# Altium PCB B225.PcbDoc
Units mm, origin at the board's own origin, x right, y up, seen from the top; angles counter-clockwise.
Board outline 22 x 40 mm, 4 copper layers (Top, Layer 1, Layer 2, Bottom), stack 1.564 mm thick; 28 components, 32 nets, 109 pads, 142 vias.
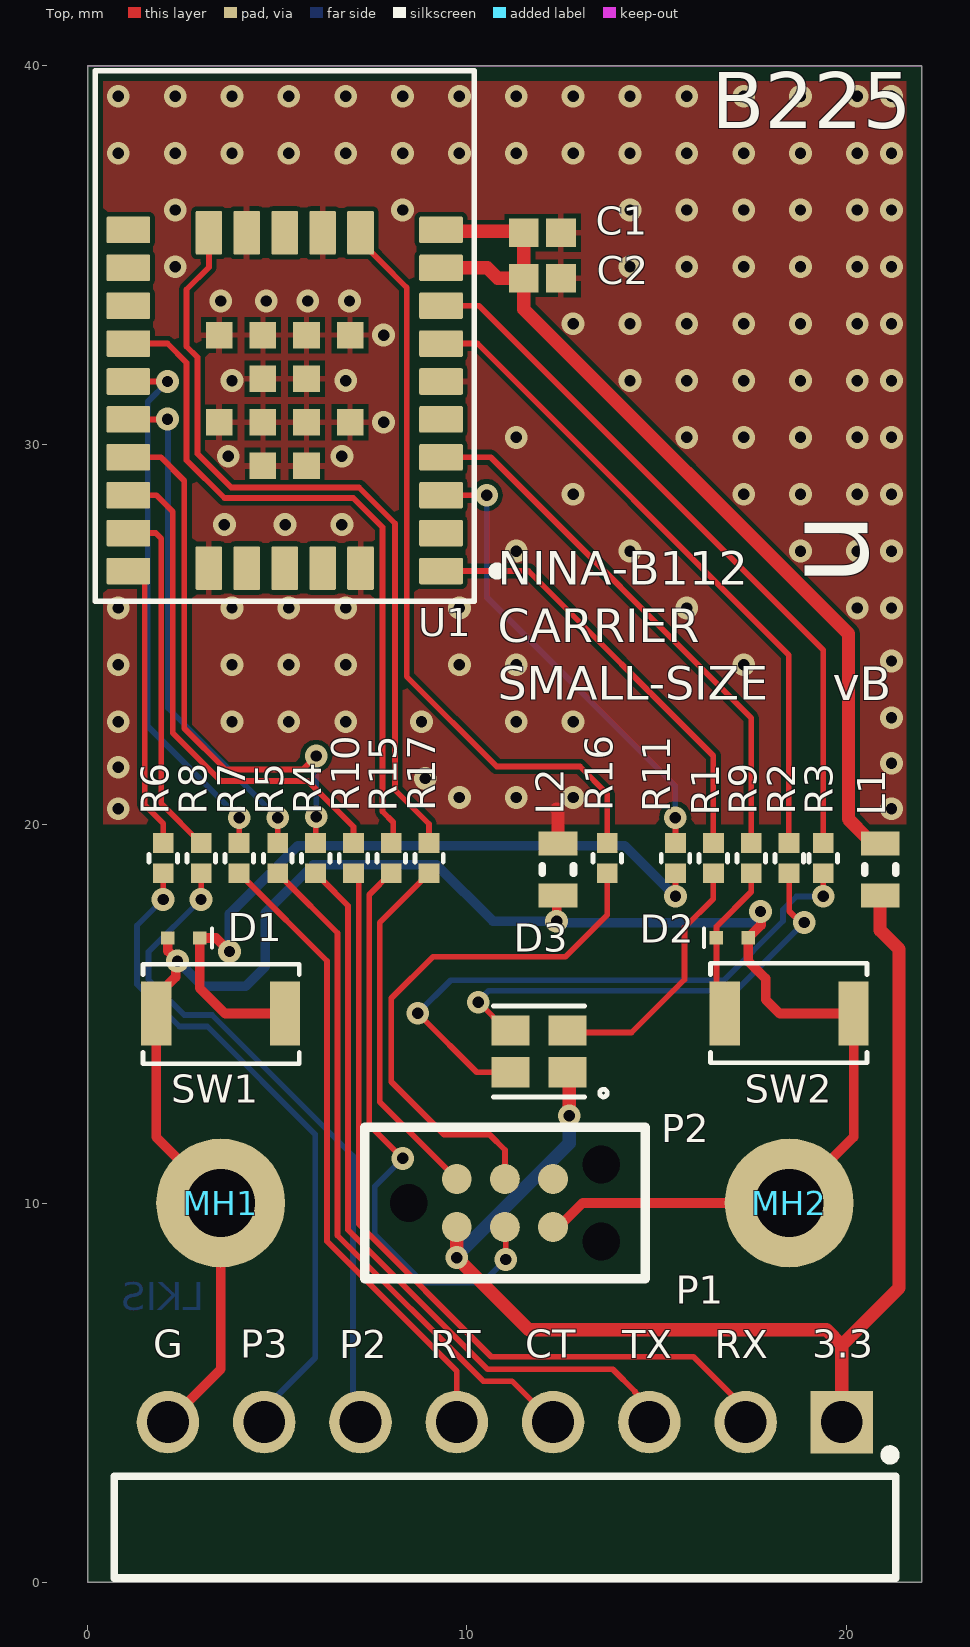
[diagram p0: Top view]
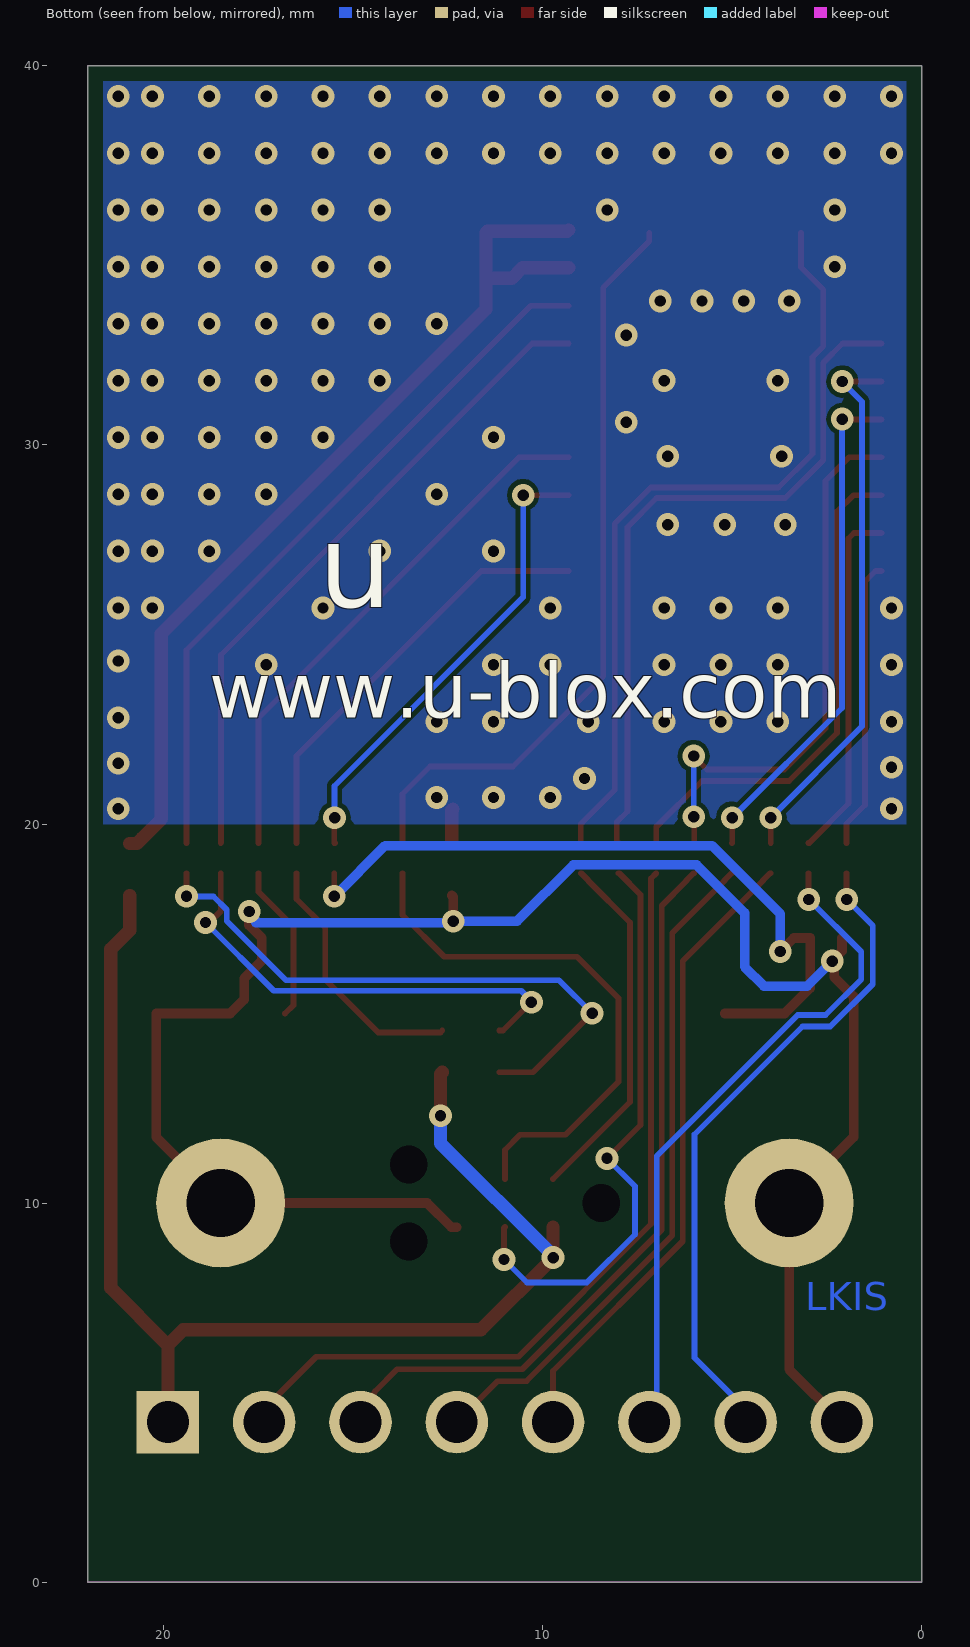
[diagram p1: Bottom view, seen from below]
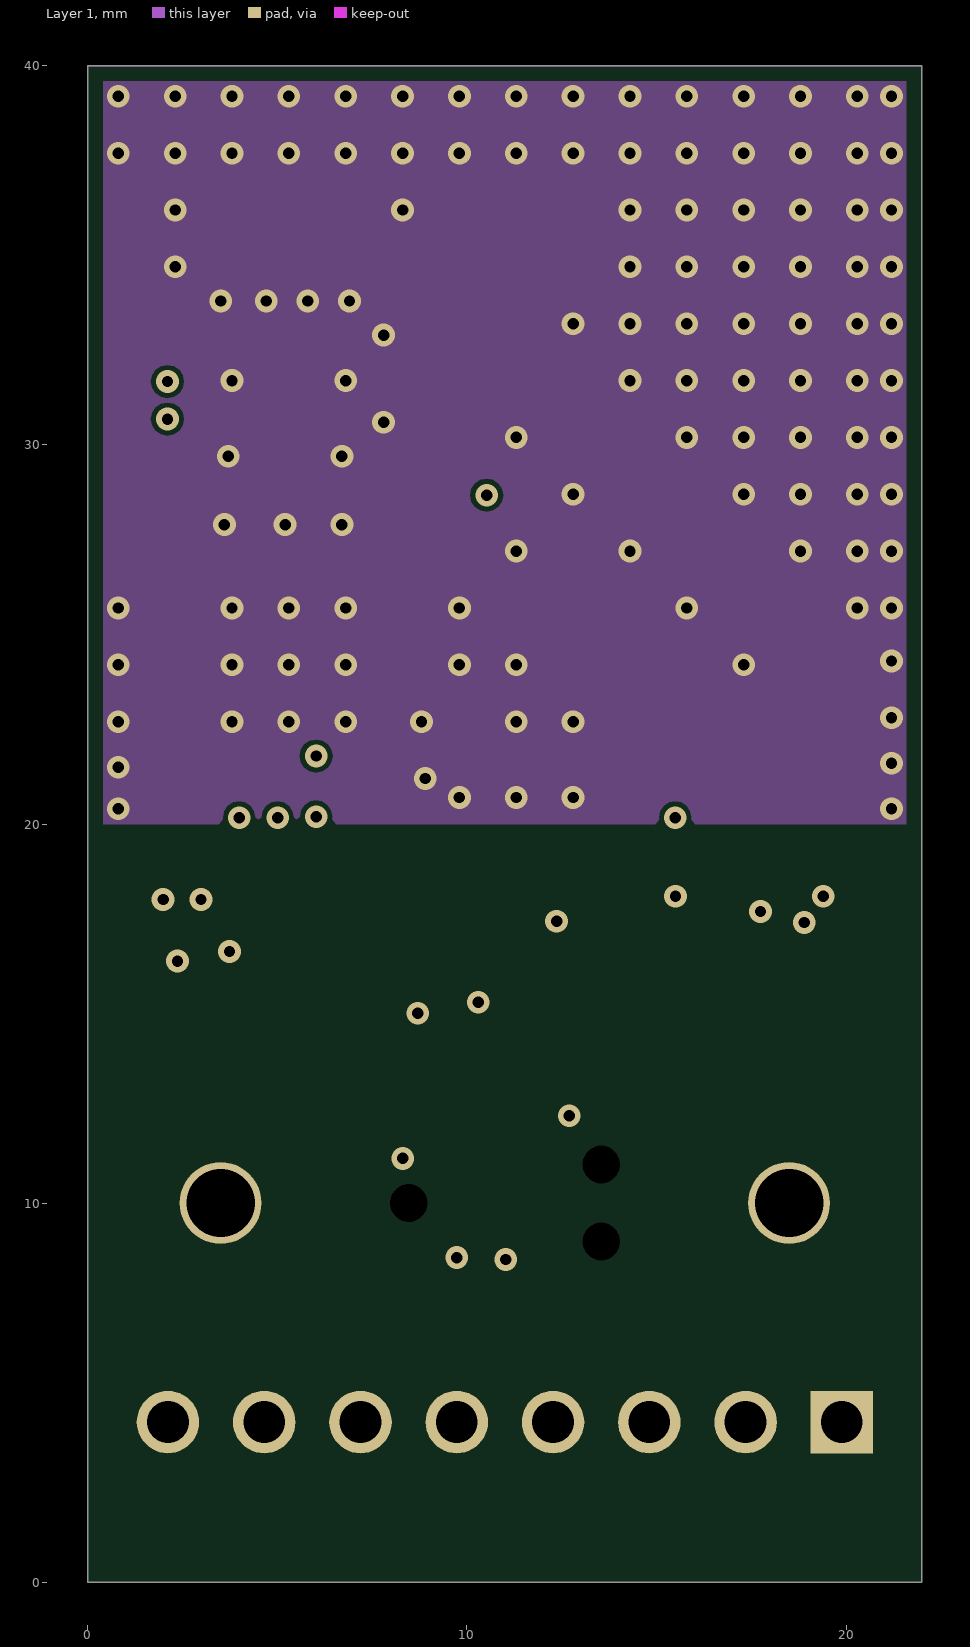
[diagram p2: Layer 1]
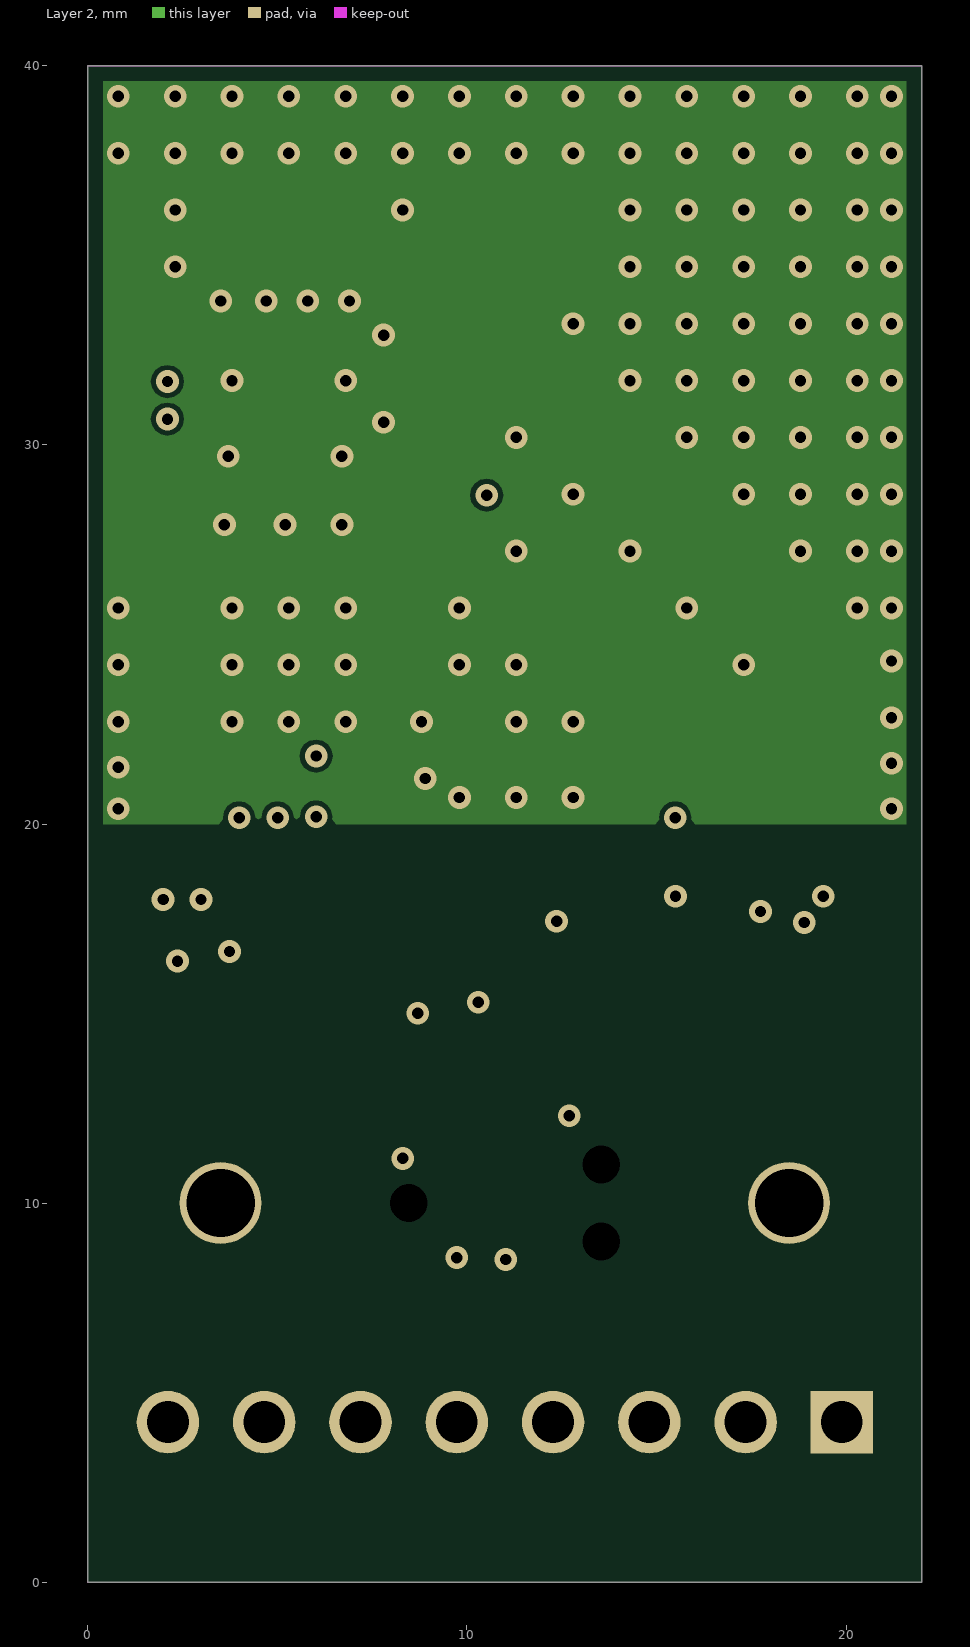
[diagram p3: Layer 2]

## Layer stack, top to bottom
Top Solder: solder mask 0.0203, Solder Resist, Dk 3.5
Top: signal copper 0.0406
Dielectric 1: prepreg 0.0711, PP-006, Dk 4.1
Layer 1: signal copper 0.035
Core: core 1.27, Core-043, Dk 4.3
Layer 2: signal copper 0.035
Dielectric 2: prepreg 0.0711, PP-006, Dk 4.1
Bottom: signal copper 0.0406
Bottom Solder: solder mask 0.0203, Solder Resist, Dk 3.5

## Board outline
0,0 22,0 22,40 0,40

## Design rules (kind name [scope] priority, off if disabled: settings)
BoardOutlineClearance [All] p1: gap=0.4 ignorepadtopadclearanceinfootprint=FALSE
Clearance "Stitching GND" [IsStitchingVia and InNet('GND') vs (IsVia and (Not IsStitchingVia)) Or IsPad] p1: gap=0.127 ignorepadtopadclearanceinfootprint=TRUE
Clearance Clearance_Poly [InPolygon vs OnLayer('Keep-Out Layer') OR (OnLayer('Multi-Layer') AND IsPad  AND Not(PadIsPlated))] p2: gap=0.127 ignorepadtopadclearanceinfootprint=TRUE
Clearance [All] p3: gap=0.127 ignorepadtopadclearanceinfootprint=FALSE except(0: Arc-Text Arc-Hole Track-Text Track-Hole SMDPad-Text SMDPad-Hole THPad-Text THPad-Hole Via-Text Via-Hole Fill-Text Fill-Hole Poly-Text Poly-Hole Region-Text Region-Hole Text-Text Text-Hole)
ComponentClearance [All] p1: gap=0.127 collisioncheckmode=3 verticalgap=0.254 showdistances=FALSE
DiffPairsRouting .14 [All] p1: maxlimit=0.254 minlimit=0.1 mostfreqgap=0.254 toplayer_maxgap=0.1 toplayer_prefgap=0.1 toplayer_minwidth=0.1 toplayer_maxwidth=0.1 toplayer_prefwidth=0.1 midlayer1_mingap=0.254 midlayer1_minwidth=0.381 midlayer1_maxwidth=0.381 midlayer1_prefwidth=0.381 midlayer2_mingap=0.254 midlayer2_minwidth=0.381 midlayer2_maxwidth=0.381 midlayer2_prefwidth=0.381 bottomlayer_maxgap=0.1 bottomlayer_prefgap=0.1 bottomlayer_minwidth=0.1 bottomlayer_maxwidth=0.1 bottomlayer_prefwidth=0.1 maxuncoupledlength=12.7
Height [All] p1: minheight=0 maxheight=25.4 prefheight=2.54
HoleSize [All] p1: absolutevalues=TRUE maxlimit=2540 minlimit=0.127 maxpercent=80.000 minpercent=20.000
HoleToHoleClearance [All] p1: gap=0.152 allowstackedmicrovias=TRUE
MinimumSolderMaskSliver [All] p1: minsoldermaskwidth=0.025
PlaneClearance [InPoly] p1: clearance=0.254
PlaneConnect [All] p1: pad.planeconnectstyle=Relief pad.reliefexpansion=0.508 pad.reliefentries=4 pad.reliefconductorwidth=0.254 pad.reliefairgap=0.254 via.planeconnectstyle=Direct via.reliefexpansion=0.508 via.reliefentries=4 via.reliefconductorwidth=0.254 via.reliefairgap=0.254
PolygonConnect ThermalVias [IsVia] p1: connectstyle=Direct reliefconductorwidth=0.254 reliefentries=4 polygonreliefangle="90 Angle" airgapwidth=0.254
PolygonConnect "PolygonConnect - Power" [InNetClass('')] p2: connectstyle=Relief reliefconductorwidth=0.254 reliefentries=4 polygonreliefangle="90 Angle" airgapwidth=0.127
PolygonConnect PolygonConnect-BGA [InComponentClass('')] p3: connectstyle=Relief reliefconductorwidth=0.152 reliefentries=4 polygonreliefangle="45 Angle" airgapwidth=0.152
PolygonConnect PolygonConnect-General [All] p4: connectstyle=Relief reliefconductorwidth=0.152 reliefentries=4 polygonreliefangle="90 Angle" airgapwidth=0.127
RoutingLayers [All] p1: top layer_v5=TRUE mid layer 1_v5=FALSE mid layer 2_v5=TRUE bottom layer_v5=TRUE
RoutingVias [All] p1: holewidth=0.3 width=0.6 viastyle="Through Hole" minholewidth=0.2 minwidth=0.5 maxholewidth=7 maxwidth=1
SMDEntry [All] p1 off: side=TRUE corner=TRUE anyangle=TRUE
SilkToBoardRegionClearance [All] p1 off:
SilkToSilkClearance [All] p1 off: silktosilkclearance=0.025
SilkToSolderMaskClearance [IsPad] p1 off: minsilkscreentomaskgap=0 clearancetoexposedcopper=TRUE
SolderMaskExpansion SolderMaskExpansion_via [IsVia] p1: expansion=-0.254 istentingtop=TRUE
SolderMaskExpansion [All] p2: expansion=0.05 istentingtop=FALSE
UnRoutedNet [All] p1: checkbadconnections=TRUE
ViasUnderSMD [All] p1: allowed=FALSE
Width [All] p1: maxlimit=2.54 minlimit=0.127 preferedwidth=0.152 toplayer_maxwidth=1 toplayer_prefwidth=0.152 bottomlayer_maxwidth=1 bottomlayer_prefwidth=0.152 minimp=50.000000 maximp=50.000000 favimp=50.000000
Width Width_1 [All] p2: maxlimit=0.254 minlimit=0.254 preferedwidth=0.254
17 further rules are at their usual default settings.

## Components (designator, comment, footprint, x,y, rotation, side; value= is the part's Value field where it differs from the comment)
C1 "Capacitor 0.1 uF +/- 5% 16 V 0402" CAPC1005X56X25ML10T15 11.99,35.6 r180 top value=100nF
C2 "Capacitor 0.1 uF +/- 5% 16 V 0402" CAPC1005X56X25ML10T15 11.99,34.4 r0 top value=100nF
D1 "110-00019" SOD-923 2.526,16.993 r180 top
D2 "110-00019" SOD-923 17,17 r0 top
D3 "115-00011" 4-PLCC 11.9,14 r0 top
L1 "LQW18AN56NJ00D" INDC1608X100X30LL20T10 20.9,18.8 r270 top
L2 "LQW18AN56NJ00D" INDC1608X100X30LL20T10 12.4,18.8 r90 top
MH1 "MH_M1.5DNP" MH_M1.5 3.5,10 r0 top
MH2 "MH_M1.5DNP" MH_M1.5 18.5,10 r0 top
P1 "61300811021" 61300811021 11,1.45 r0 top
P2 "TC2030-IDC-NLDNP" TC2030-IDC-NL 8.46,10 r0 top
R1 "180-00031499R" "RES 0402 HD" 16.5,19.1 r270 top value=499R
R2 "180-00098220R" "RES 0402 HD" 18.5,19.1 r270 top value=220R
R3 "180-00098220R" "RES 0402 HD" 19.4,19.1 r270 top value=220R
R4 "180-00098220R" "RES 0402 HD" 6.007,19.1 r270 top value=220R
R5 "180-00098220R" "RES 0402 HD" 5.007,19.1 r270 top value=220R
R6 "180-00098220R" "RES 0402 HD" 1.987,19.1 r270 top value=220R
R7 "180-00098220R" "RES 0402 HD" 3.988,19.101 r270 top value=220R
R8 "180-00098220R" "RES 0402 HD" 2.987,19.1 r270 top value=220R
R9 "180-00098220R" "RES 0402 HD" 17.5,19.1 r270 top value=220R
R10 "180-00098220R" "RES 0402 HD" 7.007,19.1 r270 top value=220R
R11 "180-00098220R" "RES 0402 HD" 15.5,19.1 r270 top value=220R
R15 "180-00098220R" "RES 0402 HD" 8,19.1 r90 top value=220R
R16 "180-00098220R" "RES 0402 HD" 13.7,19.1 r90 top value=220R
R17 "180-00098220R" "RES 0402 HD" 9,19.1 r90 top value=220R
SW1 "135-00007" B3U-1000P 3.5,15 r180 top
SW2 "135-00007" B3U-1000P 18.5,15 r0 top
U1 "NINA-B112-OPENCPU" NINA_LGA42R_1400X1000X380_PIFA 5.19,32.875 r90 top

## Footprints (in the part's own frame and the unit in brackets; to place one, negate y for a bottom-side part, rotate by r counter-clockwise, add the part's x,y. Pads: shape width x height; smd on the part's side, far side on the other; paste and mask are expansions set on the pad)
4-PLCC [mm] "4 Pin Plastic Leaded Chip Carrier, 2mm x 2mm"
  rect 1x0.8 smd: 1(0.75,-0.55) 2(-0.75,-0.55) 3(-0.75,0.55) 4(0.75,0.55)
  silkscreen extent -1.2,-1.2 1.8,1.2, body extent -1.05,-1.05 1.05,1.05, height 1.01
61300811021 [mm]
  rect 1.65x1.65 hole 1.1: 1(8.89,2.77)
  round 1.65 hole 1.1: 2(6.35,2.77) 3(3.81,2.77) 4(1.27,2.77) 5(-1.27,2.77) 6(-3.81,2.77) 7(-6.35,2.77) 8(-8.89,2.77)
  silkscreen extent -10.31,-1.35 10.31,2.03, body extent -10.16,-7.27 10.16,3.09, height 2.58
B3U-1000P [mm] "Button Tactile, SMT 4mm x 2.5mm, height 1.2mm"
  rect 0.8x1.7 smd: 1(-1.7,0) 2(1.7,0)
  silkscreen extent -2.07,-1.3 2.05,1.33, body extent -2,-1.25 2,1.25, height 1.6
CAPC1005X56X25ML10T15 [mm] "Chip Capacitor, 2-Leads, Body 1.10x0.60mm, IPC Low Density"
  rect 0.78x0.74 smd: 1(-0.49,0) 2(0.49,0)
  body extent -0.55,-0.3 0.55,0.3, height 0.56
INDC1608X100X30LL20T10 [mm] "Chip Inductor, 2-Leads, Body 1.8x1.1mm, IPC High Density"
  rect 0.64x1.02 smd: 1(-0.685,0) 2(0.685,0)
  silkscreen extent -0.1,-0.41 0.1,0.41, body extent -0.9,-0.55 0.9,0.55, height 1
MH_M1.5 [mm] "Mounting Hole M1.5 Metric, 3.4mm diameter pad"
  round 3.4 / inner round 2.159 / far side round 3.4 hole 1.8: 1(0,0)
NINA_LGA42R_1400X1000X380_PIFA [mm] "Stand-alone Bluetooth low energy module"
  rrect10% 0.7x1.15 smd paste+0 mask+0.05: 1(-6.2,-4.125) 2(-5.2,-4.125) 3(-4.2,-4.125) 4(-3.2,-4.125) 5(-2.2,-4.125) 6(-1.2,-4.125) 7(-0.2,-4.125) 8(0.8,-4.125) 9(1.8,-4.125) 10(2.8,-4.125) 16(2.8,4.125) 17(1.8,4.125) 18(0.8,4.125) 19(-0.2,4.125) 20(-1.2,4.125) 21(-2.2,4.125) 22(-3.2,4.125) 23(-4.2,4.125) 24(-5.2,4.125) 25(-6.2,4.125)
  rrect10% 1.15x0.7 smd paste+0 mask+0.05: 11(2.725,-2) 12(2.725,-1) 13(2.725,0) 14(2.725,1) 15(2.725,2) 26(-6.125,2) 27(-6.125,1) 28(-6.125,0) 29(-6.125,-1) 30(-6.125,-2)
  rect 0.7x0.7 smd paste+0 mask+0.05: 31(-3.425,-0.575) 32(-3.425,0.575) 33(-2.275,-1.725) 34(-2.275,-0.575) 35(-2.275,0.575) 36(-2.275,1.725) 37(-1.125,-0.575) 38(-1.125,0.575) 39(0.025,-1.725) 40(0.025,-0.575) 41(0.025,0.575) 42(0.025,1.725)
  silkscreen extent -7,-5.7 7,5, body extent -7,-5 7,5, height 3.81
"RES 0402 HD" [mm] "Chip Resistor, 2-Leads, Body 1.05x0.54mm, IPC High Density"
  rect 0.52x0.55 smd: 1(-0.4,0) 2(0.4,0)
  silkscreen extent -0.1,-0.38 0.1,0.38, body extent -0.55,-0.3 0.55,0.3, height 0.4
SOD-923 [mm] "SOD-923, 2-Leads, Body 1.25x2.50mm, IPC High Density,"
  rect 0.36x0.35 smd mask+0.05: 1(-0.42,0) 2(0.42,0)
  silkscreen extent -0.75,-0.25 -0.75,0.25, body extent -0.4,-0.3 0.4,0.3, height 0.4
TC2030-IDC-NL [mm] "Tag-Connect 6-Pin No Legs"
  round 0.9 hole 0.995 unplated: 0(0,0) 0(5.08,-1.016) 0(5.08,1.016)
  round 0.79 smd paste-0.39: 1(1.27,-0.635) 2(1.27,0.635) 3(2.54,-0.635) 4(2.54,0.635) 5(3.81,-0.635) 6(3.81,0.635)
  silkscreen extent -1.16,-2 6.24,2

## Part data
C1 C2: library part CMP-001-00001-4, "Chip Capacitor, 0.1 uF, +/- 5%, 16 V, 0402 (1005 Metric)", Capacitor Type=Ceramic, Case/Package=0402, Max Operating Temperature=125°C, Min Operating Temperature=-55°C, Tolerance=5%, Voltage Rating=16V, Mounting Technology=SM, Pins=2, RoHS Compliant=True
D1 D2: "Diode, ESD9B, 3.3V, ST5G, SOD-923", Manufacturer="ON Semiconductor", Manufacturer P/N=ESD9B3.3ST5G, MFG Package=SOD-923, Package Type=SOD, Part Name="Diode TVS 3.3V SOD-923", Voltage=3.3V, Arena Link=https://app.bom.com/a/4M5DJQ9Q9SR7DV4H?v=spec.summary, Body Size="0.8mm x 0.6mm", Component Mounting Type=SMT, Diode Type=TVS, Height=0.4mm, Item_Phase=Production, Part Number=110-00019, Part_Type=Diode, Pins=2, Revision=0A, Supplier 1=Arrow, Supplier Part Number 1=ESD9B3.3ST5G, Use in new designs=Yes
D3: "LED, RGB Diffused SMT, PLCC4 4 Pin", Color=RGB, Current="20mA Red, 10mA Green, 10mA, Blue", Manufacturer="Cree, Inc.", Manufacturer P/N=CLMVB-FKA-CFHEHLCBB7a363, MFG Package=PLCC4, Package Type=Custom, Part Name="LED RGB SMT 2mm x 2mm", Supplier Part Number 1=941-CLMVBFKACFHEHLCB, Voltage=5V, Arena Link=https://app.bom.com/a/UCV39GZGZIHY581D?v=spec.summary, Body Size="2.0mm x 2.0mm", Component Mounting Type=SMT, Height=1mm, Item_Phase=Production, Mounting Type=Vertical, Number of Circuits=3, Part Number=115-00011, Part_Type=LED, Pins=4, Revision=0A, Supplier 1=Mouser, Use in new designs=Yes, Vf="2V Red, 3V Green, 3V Blue"
L1 L2: library part CMP-2000-06600-1, "Chip Inductor, 56 nH, +/-5%, 390 mA, -55 to 125 degC, 0603 (1608 Metric), RoHS, Tape and Reel", Current Rating=360mA, DC Resistance (DCR)=290mOhmMax, Frequency - Self Resonant=2.4GHz, Frequency - Test=100MHz, Inductance=56nH, Manufacturer=Murata, Operating Temperature=-55°C~125°C, Package / Case=0603(1608Metric), Package Description="2-Pin Surface Mount Device, Body 1.6 x 0.8 mm", Package Reference=0603, Q @ Freq=38@200MHz, Standard Package=1, Tolerance=±5%, Category=Inductors,Coils,Chokes, Datasheet URL=http://search.murata.co.jp/Ceramy/image/img/PDF/ENG/L0075S0080LQW18A_10.pdf, Datasheet Version=1/2019, Family=FixedInductors, Height - Seated (Max)="0.039\"(1.00mm)", Manufacturer URL=http://www.murata.com/, Material - Core=Non-Magnetic, Mounting Technology=SurfaceMount, Mounting Type=SurfaceMount, Online Catalog=LQWSeries, Other Names=490-6876-1, Packaging=CutTape(CT), Product Training Modules=InductorProductsChipRFInductors, Series=LQW18A_00, Shielding=Unshielded, Size / Dimension="0.063\"Lx0.031\"W(1.60mmx0.80mm)", Type=Wirewound
MH1 MH2: library part MH_M1.5, "1.5M screw mounting hole, plated", Added By="Jeremy D", Added Date=2015-07-09, DNP=DNP, Height=0mm, Part Number=MH_M1.5, Size="3.4mm x 3.4mm", Type="Mounting Hole"
P1: library part CMP-1502-01075-1, "THT Angled Pin Header WR-PHD, Pitch 2.54 mm, Single Row, 8 pins", Contact Resistance=20mOhm, Manufacturer="Wurth Elektronik", Operating Temperature=-40to105degC, Rated Current=3A, Withstanding Voltage=500VAC, Working Voltage=250VAC, Datasheet URL=https://katalog.we-online.de/em/datasheet/6130xx11021.pdf, Gender=Male, Manufacturer Part Number=61300811021, Manufacturer URL=http://www.we-online.de, Mounting Technology=THT, Orientation=Angled, Package Reference=61300811021, Packaging=Bag, Part Number=61300811021, Pin Number=8, Pitch=2.54mm, Publisher=WurthElektronik, Row Number=Single
P2: library part TC2030-IDC-NL, "CON PADS FOR CBL PLUG-OF-NAILS 6-PIN NO LEGS", Manufacturer="TAG Connect", Added By="Paul B", Added Date=2015-04-22, DNP=DNP, Height=0, Manufacturer P/N=TC2030-IDC-NL, Part Number=TC2030-IDC-NL, Size="6.731mm x 12.446mm"
R1: library part 180-00031, "Resistor, 499ohm, 1%, 1/16W, 0402", Manufacturer="Rohm Semiconductor", Manufacturer 2="Samsung Electro-Mechanics America, Inc", Manufacturer P/N=MCR01MRTF4990, Manufacturer P/N 2=RC1005F4990CS, Part Name="RES SMD 499 OHM 1% 1/16W 0402", Power=1/16W, Supplier Part Number 1=RHM499CDCT-ND, Tolerance="+/- 1%", Alternate Footprint Ref="RES 0402", Arena Link=https://app.bom.com/a/Q8RZ5CVCVEDU1SS5?v=spec.summary, Component Mounting Type=SMT, Height=0.4mm, Item_Phase=Production, Part Number=180-00031, Part_Type=Resistor, Pins=2, Revision=0D, Size=0402, Supplier 1=Digi-Key, Supplier 2=Digi-Key, Supplier Part Number 2=1276-3992-1-ND, Use in new designs=Yes
R2 R3: library part 180-00098, "Resistor, 220ohm, 5%, 1/16W, 0402.", Manufacturer="Panasonic Electronic Components", Manufacturer 2="Samsung Electro-Mechanics America, Inc", Manufacturer P/N=ERJ-2GEJ221X, Manufacturer P/N 2=RC1005J221CS, Part Name="RES SMD 220 OHM 5% 1/16W 0402", Power=1/16W, Supplier Part Number 1=P220JCT-ND, Tolerance="+/- 5%", Alternate Footprint Ref="RES 0402", Arena Link=https://app.bom.com/a/8Q9HNUDUDWVBJC30?v=spec.summary, Component Mounting Type=SMT, Height=0.4mm, Item_Phase=Production, Part Number=180-00098, Part_Type=Resistor, Pins=2, Revision=0C, Size=0402, Supplier 1=Digi-Key, Supplier 2=Digi-Key, Supplier Part Number 2=1276-4360-1-ND, Use in new designs=Yes
R4 R5 R6 R7 R8 R9 R10 R11 R15 R16 R17: library part 180-00098, "Resistor, 220ohm, 5%, 1/16W, 0402.", Manufacturer 1="Samsung Electro-Mechanics America, Inc", Manufacturer 2="Panasonic Electronic Components", Manufacturer Part Number 1=RC1005J221CS, Manufacturer Part Number 2=ERJ-2GEJ221X, Max Operating Temp=155, Min Operating Temp=-55, Part Name="RES SMD 220 OHM 5% 1/16W 0402", Power=1/16W, Supplier Part Number 1=1276-4360-1-ND, Tolerance="+/- 5%", Voltage=None, Height=0.4mm, Item Phase="In Production", Part Number=180-00098, Pins=2, Revision=0C, Size=0402, Supplier 1=Digi-Key, Supplier 2=Digi-Key, Supplier Part Number 2=P220JCT-ND, UBX Code=None, Use in new designs=Yes
SW1 SW2: "Button, Momentary SPST-NO, 0.05A, 12V, 3mm x 2.5mm", Current=50mA, Manufacturer="Omron Electronics Inc-EMC Div", Manufacturer P/N=B3U-1000P, Part Name="SWITCH TACTILE SPST-NO 0.05A 12V", Supplier Part Number 1=SW1020CT-ND, Voltage=12VDC, Arena Link=https://app.bom.com/a/TBU28FYFYHGV5FQ0?v=spec.summary, Body Size="3mm x 2.5mm", Component Mounting Type=SMT, Height=1.2mm, Item_Phase=Production, Part Number=135-00007, Part_Type=Button, Pins=2, Revision=0A, Supplier 1=Digi-Key, Switch/Button Circuit=SPST, Switch/Button Function=Off-Mom, Use in new designs=Yes
U1: "u-blox NINA-B112 Bluetooth 5 LE module", Manufacturer=u-blox, Part Description="Stand-alone Bluetooth low energy module"

## Via types
v1: diameter 0.6, hole 0.3, Top to Bottom, tented both sides, 142 vias

## Nets (pads, with @x,y where several pads share a name; then routed paths per layer and width w, separated by ;. In a path a pad name is that pad's centre, name@x,y a point inside that pad or via, vN(x,y) a via of type N, cw(c..) or ccw(c..) an arc to the next point about the centre after c; other vN are vias at no path point)
3V3: D3.1 L1.2 P1.1 P2.1 | length 32.8
  Top w0.35: P2.1 9.73,8.558 11.633,6.655 19.485,6.655 19.89,6.25 ; D3.1 12.7,13.4 v1(12.7,12.3) ; P1.1 19.89,6.25 ; L1.2 20.9,17.2 21.4,16.7 21.4,7.76 19.89,6.25
  Bottom w0.35: v1(9.728,8.56) 9.728,8.603 12.7,11.574 v1(12.7,12.3)
3V3_M: C1.2 C2.1 L1.1 U1.9 U1.10 | length 24.6
  Top w0.35: U1.9 10.537,34.675 10.812,34.4 C2.1 ; U1.10 9.352,35.637 11.463,35.637 C1.2 C2.1 ; L1.1 20.71,19.485 20.565,19.63 20.066,20.129 20.066,25.019 11.5,33.585 C2.1
B_M: R3.1 U1.8 | length 18.9
  Top w0.152: U1.8 10.318,33.675 19.4,24.593 R3.1
BLUE: D3.2 R3.2 | length 15.7
  Top w0.152: v1@8.8,14.91 10.26,13.45 D3.2 ; v1(19.4,18.09) R3.2
  Bottom w0.152: v1(8.7,15.01) 9.569,15.879 16.779,15.879 18.339,17.439 18.339,17.739 18.69,18.09 v1(19.4,18.09)
BT1_M: R11.1 U1.3 | length 12.5
  Top w0.152: U1.3 v1(10.519,28.675) v1@10.521,28.677 ; R11.1@15.485,19.5 R11.1 15.5,20.162 v1(15.494,20.168)
  Bottom w0.152: v1(10.519,28.675) 10.519,25.981 15.494,21.006 v1(15.494,20.168)
BT2_M: R9.1 U1.4 | length 14.3
  Top w0.152: U1.4 10.625,29.675 17.5,22.8 R9.1
BUTTON1: D1.1 R11.2 SW1.1 | length 19.5
  Top w0.152: v1(15.5,18.09) R11.2
  Top w0.254: v1(3.734,16.637) 3.378,16.993 D1.1 2.946,15.672 3.618,15 SW1.1
  Bottom w0.254: v1(3.734,16.637) 3.734,17.628 5.537,19.431 14.159,19.431 v1(15.5,18.09)
BUTTON2: D2.1 R9.2 SW2.1 | length 4.2
  Top w0.152: SW2.1 16.58,15.22 D2.1 16.58,17.291 17.5,18.211 R9.2
CLK_M: R16.2 U1.11 | length 20.1
  Top w0.152: U1.11 7.19,35.375 7.716,34.849 8.407,34.158 8.407,23.893 10.786,21.514 12.979,21.514 13.7,20.793 R16.2
CTS: P1.4 R5.2 | length 17.9
  Top w0.152: R5.2 5.022,18.7 5.206,18.516 5.206,18.501 6.584,17.123 6.584,9.142 10.426,5.3 11.19,5.3 P1.4
CTS_M: R5.1 U1.21 | length 13.4
  Top w0.152: U1.21 2.089,30.675 v1(2.097,30.683) ; v1(5.004,20.168) 5.004,19.503 R5.1
  Bottom w0.152: v1(2.097,30.683) 2.108,30.672 2.108,23.063 v1(5.004,20.168)
G_M: R2.1 U1.7 | length 17.5
  Top w0.152: U1.7 10.276,32.675 18.491,24.46 18.491,19.509 R2.1
GND: D1.2 D2.2 L2.1 MH1.1 MH2.1 P1.8 P2.5 SW1.2 SW2.2 | length 51.1
  Top w0.254: D1.2 2.106,16.649 2.362,16.393 v1(2.362,16.383) 2.314,16.334 2.314,15.964 1.8,15.45 SW1.2 1.8,11.736 3.5,10.036 MH1.1 3.5,5.61 P1.8 ; P2.5 12.415,9.365 13.05,10 MH2.1 18.5,10.036 20.2,11.736 SW2.2 18.249,15 17.882,15.367 17.882,15.929 17.42,16.39 D2.2 17.425,17 17.757,17.332 17.757,17.676 v1(17.743,17.69) ; v1(12.363,17.436) 12.363,18.078 L2.1
  Bottom w0.254: v1(2.362,16.383) 3.023,15.723 4.166,15.723 4.674,16.231 4.674,17.653 5.944,18.923 9.195,18.923 10.682,17.436 v1(12.363,17.436) 12.4,17.399 17.577,17.399 17.577,17.454 17.743,17.621 v1(17.743,17.69)
GND_M: C1.1 C2.2 L2.2 U1.6 U1.12 U1.14 U1.26 U1.30 U1.31 U1.32 U1.33 U1.34 U1.35 U1.36 U1.37 U1.38 U1.39 U1.40 U1.41 U1.42 | length 0.9
  Top w0.35: 12.37,20.396 12.4,20.366 L2.2
  other v1: 0.8,20.4 21.2,20.4 9.8,20.7 11.3,20.7 12.8,20.7 8.9,21.2 0.8,21.5 21.2,21.6 0.8,22.7 3.8,22.7 5.3,22.7 6.8,22.7 8.8,22.7 11.3,22.7 12.8,22.7 21.2,22.8 0.8,24.2 3.8,24.2 5.3,24.2 6.8,24.2 9.8,24.2 11.3,24.2 17.3,24.2 21.2,24.3 0.8,25.7 3.8,25.7 5.3,25.7 6.8,25.7 9.8,25.7 15.8,25.7 20.3,25.7 21.2,25.7 11.3,27.2 14.3,27.2 18.8,27.2 20.3,27.2 21.2,27.2 3.6,27.9 5.2,27.9 6.7,27.9 12.8,28.7 17.3,28.7 18.8,28.7 20.3,28.7 21.2,28.7 3.7,29.7 6.7,29.7 11.3,30.2 15.8,30.2 17.3,30.2 18.8,30.2 20.3,30.2 21.2,30.2 7.8,30.6 3.8,31.7 6.8,31.7 14.3,31.7 15.8,31.7 17.3,31.7 18.8,31.7 20.3,31.7 21.2,31.7 7.8,32.9 12.8,33.2 14.3,33.2 15.8,33.2 17.3,33.2 18.8,33.2 20.3,33.2 21.2,33.2 3.5,33.8 4.7,33.8 5.8,33.8 6.9,33.8 2.3,34.7 14.3,34.7 15.8,34.7 17.3,34.7 18.8,34.7 20.3,34.7 21.2,34.7 2.3,36.2 8.3,36.2 14.3,36.2 15.8,36.2 17.3,36.2 18.8,36.2 20.3,36.2 21.2,36.2 0.8,37.7 2.3,37.7 3.8,37.7 5.3,37.7 6.8,37.7 8.3,37.7 9.8,37.7 11.3,37.7 12.8,37.7 14.3,37.7 15.8,37.7 17.3,37.7 18.8,37.7 20.3,37.7 21.2,37.7 0.8,39.2 2.3,39.2 3.8,39.2 5.3,39.2 6.8,39.2 8.3,39.2 9.8,39.2 11.3,39.2 12.8,39.2 14.3,39.2 15.8,39.2 17.3,39.2 18.8,39.2 20.3,39.2 21.2,39.2
GREEN: D3.3 R2.2 | length 12.3
  Top w0.152: v1@10.214,15.29 10.3,15.376 v1(10.3,15.3) 11.05,14.55 D3.3 ; R2.2 18.5,17.7 18.8,17.4 v1(18.9,17.4)
  Bottom w0.152: v1@10.3,15.376 10.324,15.4 10.367,15.4 10.567,15.6 17.1,15.6 v1(18.9,17.4)
IO_M: R17.2 U1.15 | length 21
  Top w0.152: U1.15 3.19,34.69 2.6,34.1 2.6,32.6 2.887,32.313 2.887,29.77 3.778,28.879 7.151,28.879 8.103,27.927 8.103,20.897 9,20 R17.2
nRESET: P2.3 R15.1 | length 15.5
  Top w0.152: R15.1 7.985,18.7 7.421,18.136 7.421,12.061 v1(8.306,11.176) ; P2.3 11.024,9.341 v1(11.024,8.509)
  Bottom w0.152: v1(8.306,11.176) 7.569,10.439 7.569,9.169 8.839,7.899 10.414,7.899 v1(11.024,8.509)
nRST_M: R15.2 U1.19 | length 18.7
  Top w0.152: U1.19 2.095,32.675 2.6,32.17 2.6,29.6 3.6,28.6 7,28.6 7.768,27.832 7.768,20.332 8.052,20.048 8.052,19.552 R15.2
P0.02: P1.6 R8.2 | length 17.5
  Top w0.152: v1(2.981,18.009) 2.987,18.014 R8.2
  Bottom w0.152: v1(2.981,18.009) 1.599,16.627 1.599,15.899 2.539,14.96 3.276,14.96 6.994,11.241 6.994,4.766 P1.6@7.19,4.57
P0.02_M: R8.1 U1.24 | length 9.4
  Top w0.152: U1.24 1.789,27.675 1.931,27.533 1.931,20.541 2.972,19.5 R8.1
P0.03: P1.7 R6.2 | length 17.4
  Top w0.152: v1(1.981,18.009) 1.987,18.014 R6.2
  Bottom w0.152: v1(1.981,18.009) 1.295,17.323 1.295,15.773 2.413,14.656 3.15,14.656 5.994,11.811 5.994,5.914 P1.7@4.65,4.57
P0.03_M: R6.1 U1.25 | length 7.7
  Top w0.152: U1.25 1.225,26.675 1.499,26.401 1.499,20.498 1.987,20.01 R6.1
R_M: R1.1 U1.1 | length 11.5
  Top w0.152: U1.1 11.625,26.675 16.5,21.8 R1.1
RED: D3.4 R1.2 | length 6.8
  Top w0.152: D3.4 12.7,14.5 14.342,14.5 15.742,15.9 15.742,17.266 16.5,18.024 R1.2
RTS: P1.5 R7.2 | length 16.9
  Top w0.152: R7.2 4.003,18.701 4.187,18.517 4.187,18.502 6.305,16.384 6.305,8.991 9.73,5.566 P1.5
RTS_M: R7.1 U1.20 | length 14.4
  Top w0.152: U1.20 v1(2.097,31.675) ; R7.1 v1(3.988,20.168)
  Bottom w0.152: v1(2.097,31.675) 2.097,31.665 1.575,31.143 1.575,22.581 v1(3.988,20.168)
RXD: P1.2 R10.2 | length 21.5
  Top w0.152: R10.2 7.142,18.565 7.142,9.444 10.643,5.944 15.976,5.944 P1.2@17.35,4.57
RXD_M: R10.1 U1.23 | length 13.4
  Top w0.152: U1.23 1.805,28.675 2.235,28.245 2.235,22.403 3.504,21.134 5.8,21.134 7.007,19.927 R10.1
SWCLK: P2.4 R16.1 | length 14.4
  Top w0.152: P2.4 11,11.4 10.6,11.8 9.4,11.8 8,13.2 8,15.4 9.1,16.5 12.6,16.5 13.7,17.6 R16.1
SWDIO: P2.2 R17.1 | length 9.5
  Top w0.152: R17.1 8.985,18.7 8.801,18.516 8.801,18.501 7.7,17.4 7.7,12.665 P2.2
TXD: P1.3 R4.2 | length 19.7
  Top w0.152: R4.2 6.022,18.7 6.206,18.516 6.206,18.501 6.863,17.844 6.863,9.293 10.543,5.613 13.844,5.613 14.431,5.026 14.431,5.004 14.81,4.625 P1.3@14.81,4.57
TXD_M: R4.1 U1.22 | length 14.6
  Top w0.152: U1.22 1.923,29.675 2.54,29.058 2.54,22.528 3.63,21.438 5.664,21.438 v1(6.02,21.793) ; R4.1 6.007,20.18 v1(6.02,20.193)
  Bottom w0.152: v1(6.02,20.193) v1(6.02,21.793)
pads on no net: P2.0 P2.6 U1.2 U1.5 U1.13 U1.16 U1.17 U1.18 U1.27 U1.28 U1.29

## Polygon pours and split planes (outlines as drawn)
GND_M on Top "GND_M_L01_P016" (solid, remove dead copper, pour order 16): 0,40 0,20 22,20 22,40
GND_M on Bottom "GND_M_L04_P017" (solid, remove dead copper, pour order 17): 0,40 0,20 22,20 22,40
GND_M on Layer 1 "GND_M_L02_P018" (solid, remove dead copper, pour order 18): 0,40 0,20 22,20 22,40
GND_M on Layer 2 "GND_M_L03_P019" (solid, remove dead copper, pour order 19): 0,40 0,20 22,20 22,40

## Keep-outs
Keep-Out Layer:
  the board outline again, w0.025

## Other copper
Top:
  pour cut-out: 9.72,9.735 9.72,10.26 10.095,10.635 11.92,10.635 12.27,10.285 12.27,9.71 11.925,9.365 10.09,9.365 10.02,9.435
Bottom:
  pour cut-out: 0.6,6.7 0.6,7.75 3.225,7.75 3.225,6.7
  text "LKIS" at 3.07,6.913 h1.27

## Silkscreen, mask and mechanical layers (free items; w line width, h text height)
Top Overlay:
  text "B225" at 16.46,37.87 h2.54
  text "u" at 21.296,26.289 h3.81 r90
  text "NINA-B112 / CARRIER / SMALL-SIZE" at 10.816,22.982 h1.52
  text "vB" at 19.65,22.973 h1.52
  text "G" at 1.724,5.663 h1.27
  text "P3" at 4.021,5.665 h1.27
  text "CT" at 11.534,5.663 h1.27
  text "3.3" at 19.111,5.665 h1.27
  text "P2" at 6.625,5.65 h1.27
  text "RT" at 9.025,5.65 h1.27
  text "TX" at 14.092,5.65 h1.27
  text "RX" at 16.535,5.65 h1.27
Bottom Overlay:
  text "u" at 15.913,24.994 h3.81
  text "www.u-blox.com" at 18.796,22.31 h2.5
Route Tool Path:
  the board outline again, w0.127